# Altium PCB CT310高端控制盒图数传接口电路V1.0.PcbDoc
Units mil, origin at the board's own origin, x right, y up, seen from the top; angles counter-clockwise.
Board outline 6000 x 4000 mil, 2 copper layers (Top Layer, Bottom Layer); 1 components, 8 nets, 26 pads, 0 vias.
Unrouted connection lines stored in the file: 16.
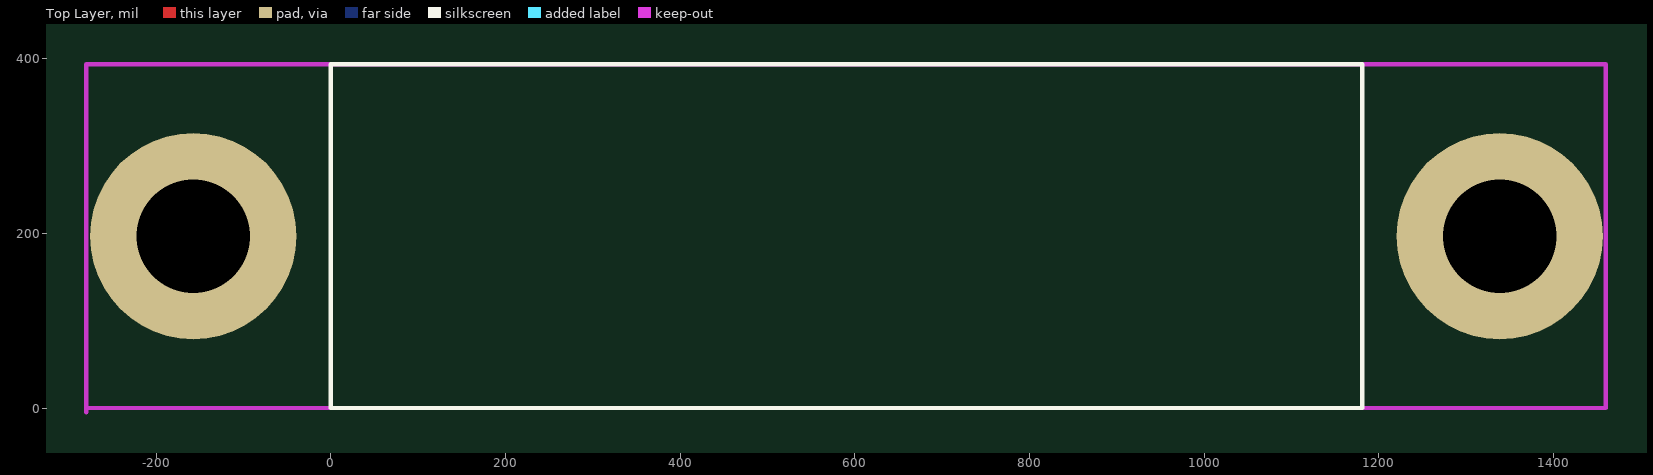
[diagram p0: Top Layer view]
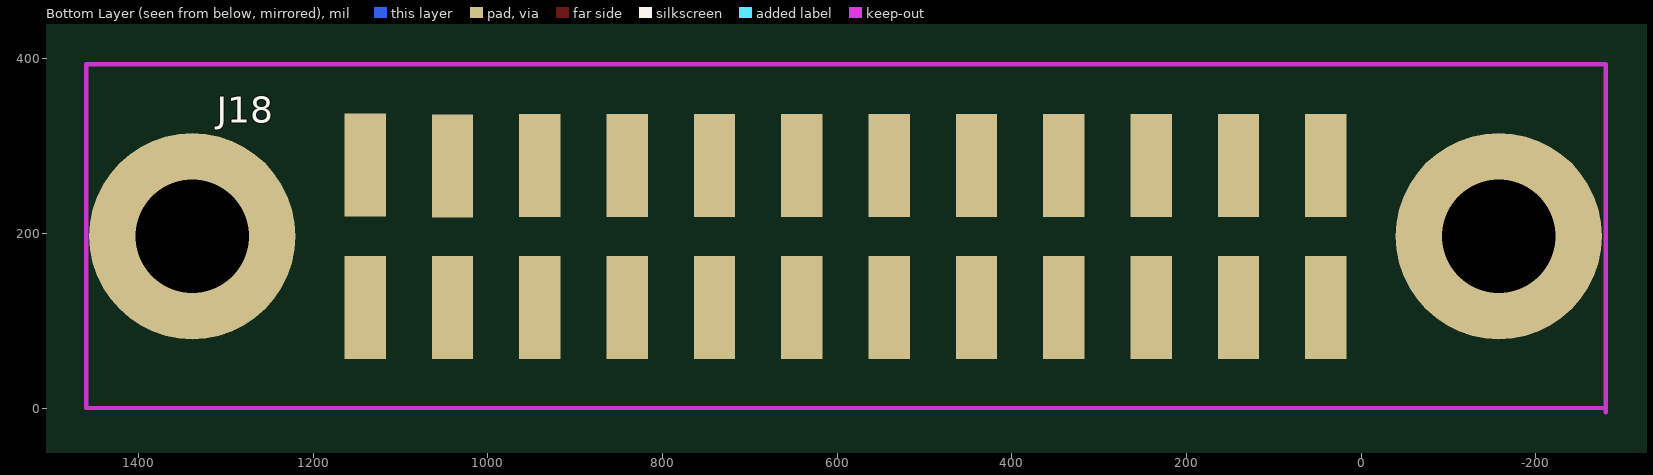
[diagram p1: Bottom Layer view, seen from below]

## Layer stack, top to bottom
Top Layer: signal copper 1.4
Dielectric: dielectric 12.6, FR-4, Dk 4.8
Bottom Layer: signal copper 1.4

## Board outline
-2540,-2040 3460,-2040 3460,1960 -2540,1960

## Design rules (kind name [scope] priority, off if disabled: settings)
Clearance [All] p1: gap=10
PolygonConnect [All] p1: connectstyle=Relief reliefconductorwidth=10 reliefentries=4 polygonreliefangle="90 Angle" airgapwidth=10
RoutingVias [All] p1: holewidth=28 width=50 viastyle="Through Hole" minholewidth=28 minwidth=50 maxholewidth=28 maxwidth=50
SolderMaskExpansion [All] p1: expansion=4
Width [All] p1: maxlimit=10 minlimit=10 preferedwidth=10
28 further rules are at their usual default settings.

## Components (designator, comment, footprint, x,y, rotation, side; value= is the part's Value field where it differs from the comment)
J18 "HD2X12S-2.54" HD2X12S-2.54 590.55,196.85 r180 bottom

## Footprints (in the part's own frame and the unit in brackets; to place one, negate y for a bottom-side part, rotate by r counter-clockwise, add the part's x,y. Pads: shape width x height; smd on the part's side, far side on the other; paste and mask are expansions set on the pad)
HD2X12S-2.54 [mm] "SOIC, 16-Leads, Body 10.6x7.7mm (max), Pitch 1.27mm, IPC Medium Density"
  rect 1.2x3 smd: 1(-13.97,-2.07) 2(-13.97,2.07) 3(-11.43,-2.07) 4(-11.43,2.04) 5(-8.89,-2.07) 6(-8.89,2.06) 7(-6.35,-2.07) 8(-6.35,2.06) 9(-3.81,-2.07) 10(-3.81,2.06) 11(-1.27,-2.07) 12(-1.27,2.06) 13(1.27,-2.07) 14(1.27,2.06) 15(3.81,-2.07) 16(3.81,2.06) 17(6.35,-2.07) 18(6.35,2.06) 19(8.89,-2.07) 20(8.89,2.06) 21(11.43,-2.07) 22(11.43,2.06) 23(13.97,-2.07) 24(13.97,2.06)

## Part data
J18: library part HEADER2X12

## Free pads (board coordinates)
  round 236.22 hole 129.92: 0(-157.48,196.85) 0(1338.58,196.85)

## Nets (pads, with @x,y where several pads share a name; then routed paths per layer and width w, separated by ;. In a path a pad name is that pad's centre, name@x,y a point inside that pad or via, vN(x,y) a via of type N, cw(c..) or ccw(c..) an arc to the next point about the centre after c; other vN are vias at no path point)
12V: J18.5 J18.6
+7.2V_S: J18.9 J18.10
BAT1+: J18.1 J18.2
CVBS: J18.19 J18.20
LINE_IN_L: J18.23 J18.24
RS485_A4: J18.13 J18.14
RS485_B4: J18.15 J18.16
SGND: J18.3 J18.4 J18.7 J18.8 J18.11 J18.12 J18.17 J18.18 J18.21 J18.22

## Keep-outs
Keep-Out Layer:
  lines w5: -280,-5 -280,393.7 1460,393.7 1460,0 -280,0

## Silkscreen, mask and mechanical layers (free items; w line width, h text height)
Top Overlay:
  lines w5: 0,0 0,393.7 1181.1,393.7 1181.1,0 0,0